# Altium PCB WirelessJoystick_Receiver.PcbDoc
Units mil, origin at the board's own origin, x right, y up, seen from the top; angles counter-clockwise.
Board outline 1275 x 1465 mil, 2 copper layers (Top Layer, Bottom Layer); 7 components, 36 nets, 60 pads, 10 vias.
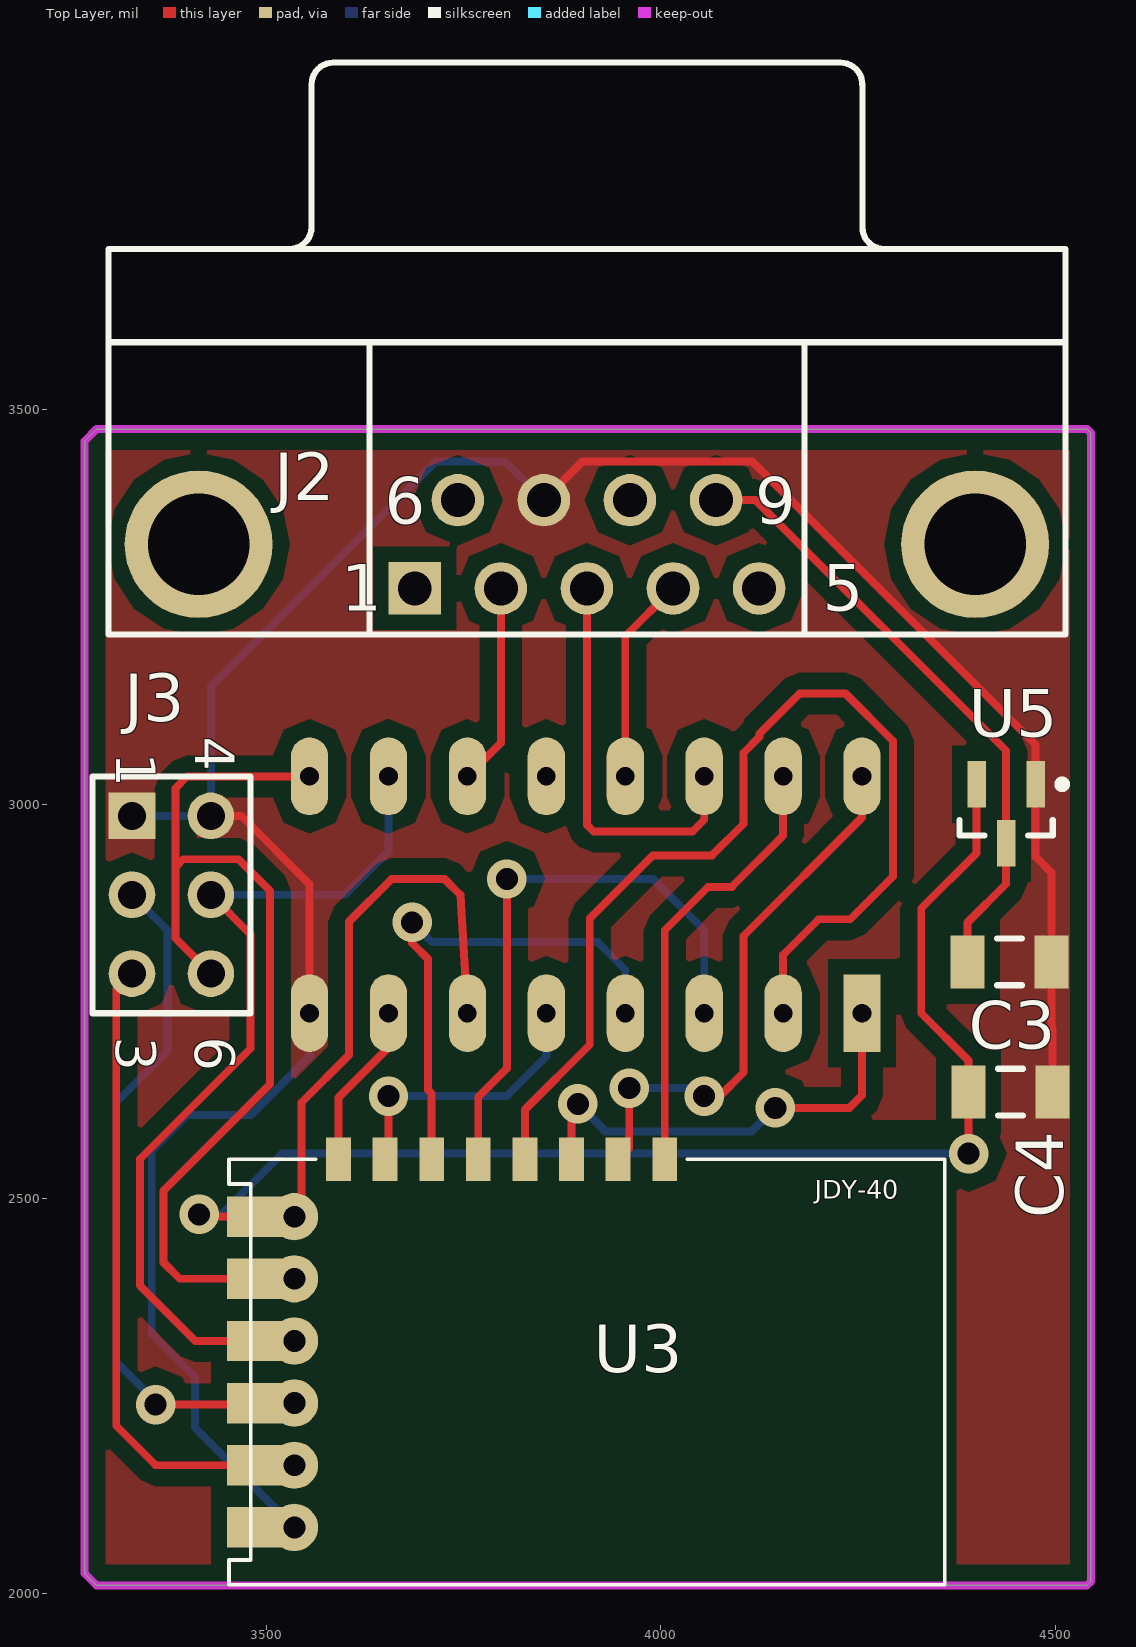
[diagram p0: Top Layer view]
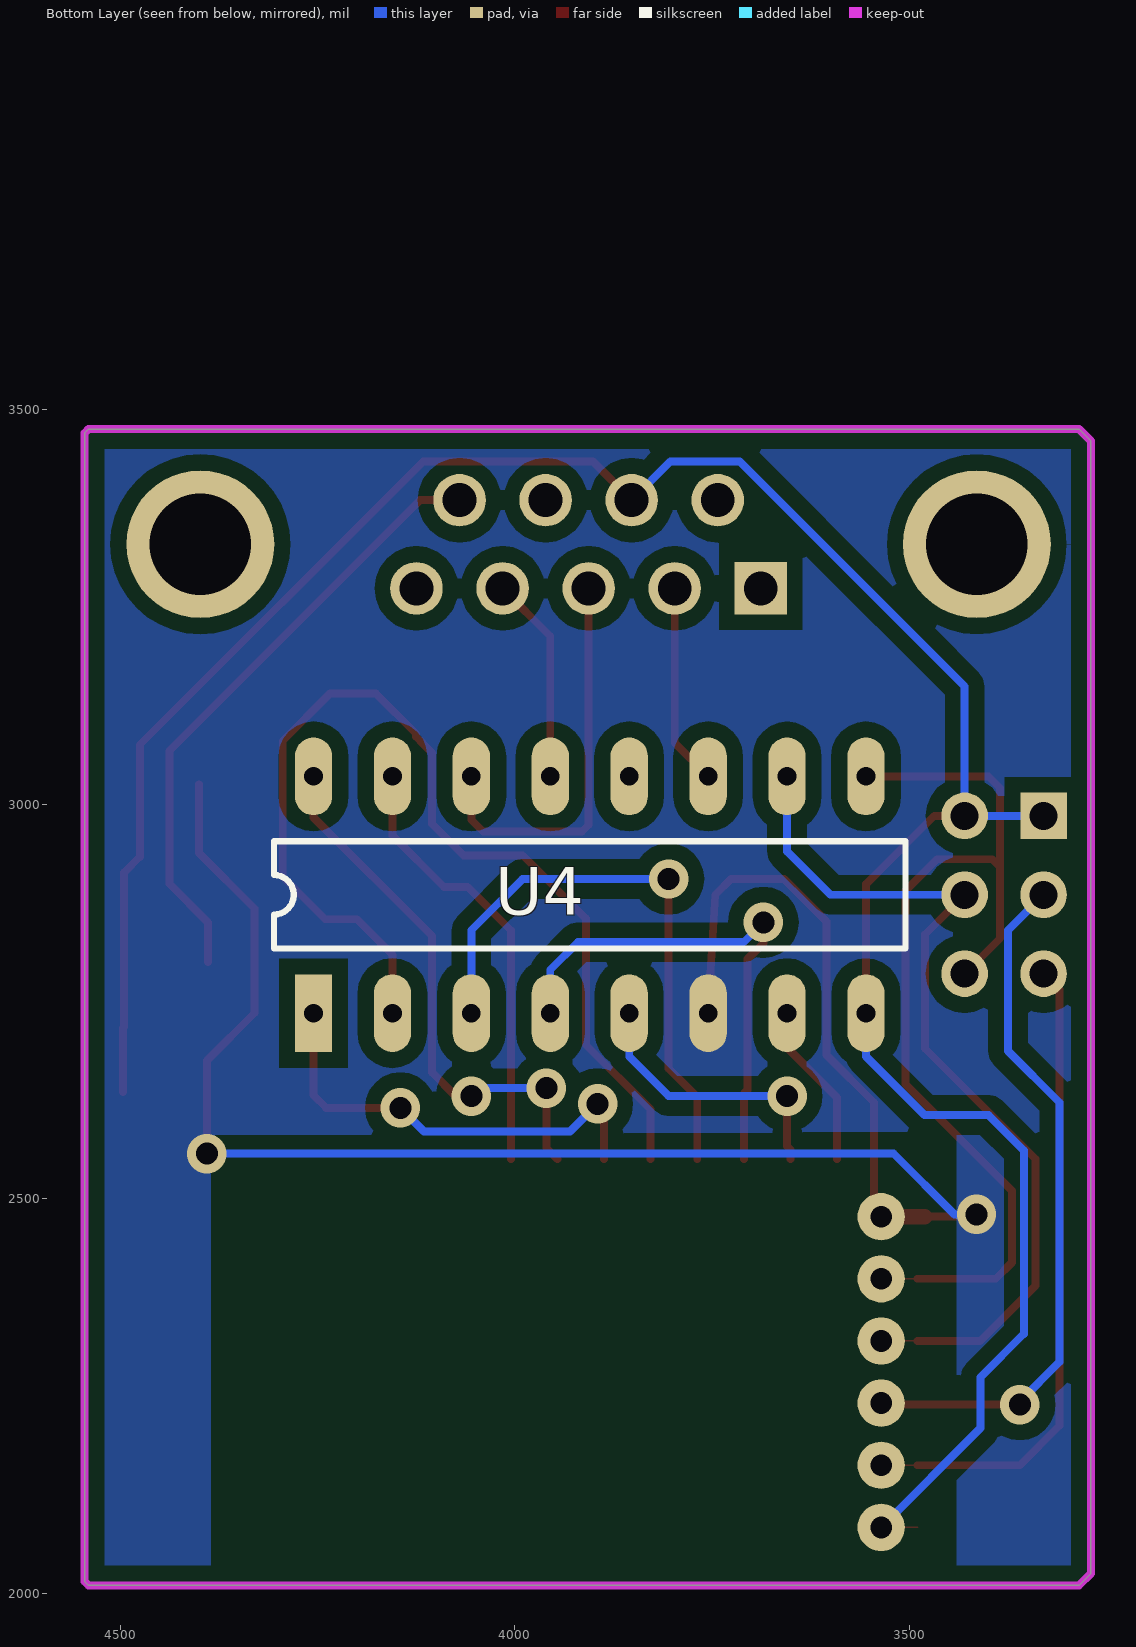
[diagram p1: Bottom Layer view, seen from below]

## Layer stack, top to bottom
Top Solder: solder mask 0.4, Solder Resist, Dk 3.5
Top Layer: signal copper 1.4
Dielectric 1: dielectric 12.6, FR-4, Dk 4.8
Bottom Layer: signal copper 1.4
Bottom Solder: solder mask 0.4, Solder Resist, Dk 3.5

## Board outline
3270,2025 3270,3460 3285,3475 4540,3475 4545,3470 4545,2015 4540,2010 3285,2010

## Design rules (kind name [scope] priority, off if disabled: settings)
Clearance Clearance_2 [InNamedPolygon('NETC4_2_L02_P002')] p1: gap=20 ignorepadtopadclearanceinfootprint=FALSE
Clearance Clearance_1 [InNamedPolygon('NETC3_1_L01_P000')] p2: gap=20 ignorepadtopadclearanceinfootprint=FALSE
Clearance [All] p3: gap=10 ignorepadtopadclearanceinfootprint=FALSE except(0: Arc-Hole Track-Hole SMDPad-Hole THPad-Hole Via-Hole Fill-Hole Poly-Hole Region-Hole Text-Hole)
PolygonConnect PolygonConnect_2 [All vs IsNamedPolygon('NETC4_2_L02_P002')] p1: connectstyle=Direct reliefconductorwidth=10 reliefentries=4 polygonreliefangle="90 Angle" airgapwidth=10
PolygonConnect PolygonConnect_1 [All vs IsNamedPolygon('NETC3_1_L01_P000')] p2: connectstyle=Direct reliefconductorwidth=10 reliefentries=4 polygonreliefangle="90 Angle" airgapwidth=10
PolygonConnect [All] p3: connectstyle=Relief reliefconductorwidth=10 reliefentries=4 polygonreliefangle="90 Angle" airgapwidth=10
RoutingVias [All] p1: holewidth=28 width=50 viastyle="Through Hole" minholewidth=28 minwidth=50 maxholewidth=28 maxwidth=50
SolderMaskExpansion [All] p1: expansion=4
Width [All] p1: maxlimit=10 minlimit=10 preferedwidth=10
30 further rules are at their usual default settings.

## Components (designator, comment, footprint, x,y, rotation, side; value= is the part's Value field where it differs from the comment)
C3 "Cap Semi" C1206 4441.85,2800 r180 top value=1uF
C4 "Cap Semi" C1206 4443.15,2635 r180 top value=1uF
J2 "DB9" DSUB1.385-2H9 3906.42,3703.11 r0 top
J3 "UART" HDR2X3_CEN 3330,2985 r270 top
U3 "JDY-40" JDY-401 4005,2550 r270 top
U4 "STC15W204S-DIP16" DIP16 4255,2735 r90 bottom
U5 "XC6206" SOT23-3N 4437.6,2987.6 r270 top

## Footprints (in the part's own frame and the unit in brackets; to place one, negate y for a bottom-side part, rotate by r counter-clockwise, add the part's x,y. Pads: shape width x height; smd on the part's side, far side on the other; paste and mask are expansions set on the pad)
C1206 [mm] "Chip Capacitor, Body 3.2x1.6mm, IPC High Density"
  rect 1.1x1.7 smd: 1(-1.35,0) 2(1.35,0)
  silkscreen extent -0.4,-0.75 0.4,0.75, body extent -1.7,-0.9 1.7,0.9, height 1.3
DIP16 [mm]
  rect 2.5x1.2 hole 0.6: 1(0,0)
  oval 2.5x1.2 hole 0.6: 2(0,-2.54) 3(0,-5.08) 4(0,-7.62) 5(0,-10.16) 6(0,-12.7) 7(0,-15.24) 8(0,-17.78) 9(7.62,-17.78) 10(7.62,-15.24) 11(7.62,-12.7) 12(7.62,-10.16) 13(7.62,-7.62) 14(7.62,-5.08) 15(7.62,-2.54) 16(7.62,0)
  silkscreen extent 2.08,-19.05 5.54,1.27
DSUB1.385-2H9 [mm] "Connector; D Subminiature; 9 Position; Right Angle; Pitch 1.385 mm"
  rect 1.69x1.69 hole 1.09: 1(-5.54,-10.92)
  round 1.69 hole 1.09: 2(-2.77,-10.92) 3(0,-10.92) 4(2.77,-10.92) 5(5.54,-10.92) 6(-4.155,-8.08) 7(-1.385,-8.08) 8(1.385,-8.08) 9(4.155,-8.08)
  round 4.76 hole 3.26: 10(-12.495,-9.5) 11(12.495,-9.5)
  silkscreen extent -15.4,-12.4 15.4,6
HDR2X3_CEN [mm] "Connector; Header; 3x2 Position"
  rect 1.5x1.5 hole 0.9: 1(0,0)
  round 1.5 hole 0.9: 2(2.54,0) 3(5.08,0) 4(0,2.54) 5(2.54,2.54) 6(5.08,2.54)
  silkscreen extent -1.27,-1.27 6.35,3.81
JDY-401 [mm]
  rect 1.4x0.8 smd: 1(0,0) 2(0,-1.5) 3(0,-3) 4(0,-4.5) 5(0,-6) 6(0,-7.5) 7(0,-9) 8(0,-10.5)
  round 1.524 hole 0.7: 9(1.85,-11.918) 10(3.85,-11.918) 11(5.85,-11.918) 12(7.85,-11.918) 13(9.85,-11.918) 14(11.85,-11.918)
  rect 1.3x2 smd: 9(1.85,-13.092) 10(3.85,-13.092) 11(5.85,-13.092) 12(7.85,-13.092) 13(9.85,-13.092) 14(11.85,-13.092)
  Top Layer lines w0.051: 11.85,-13.092 11.85,-11.918 ; 9.85,-13.092 9.85,-11.918 ; 7.85,-13.092 7.85,-11.918 ; 5.85,-13.092 5.85,-11.918 ; 3.85,-13.092 3.85,-11.918 ; 1.85,-13.092 1.85,-11.918 ; 7.85,-11.918 7.85,-11.918
  Top Layer lines w0.17: 7.85,-11.918 7.636,-11.704
  Top Layer lines w0.5: 1.85,-13.319 1.85,-13.092 1.85,-11.918 1.85,-11.694
  silkscreen extent 0,-14.02 13.7,9.01
SOT23-3N [mm] "SOT23, 3-Leads, Body 2.9x1.3mm, Pitch 0.95mm, Lead Span 2.5mm, IPC Medium Density"
  rect 1.5x0.6 smd: 1(-0.95,0.95) 2(-0.95,-0.95) 3(0.95,0)
  silkscreen extent -1.07,-1.5 0.7,1.93, body extent -0.7,-1.5 0.7,1.5, height 1.1

## Part data
C3 C4: "Capacitor (Semiconductor SIM Model)", LatestRevisionDate=29-May-2009, LatestRevisionNote="IPC-7351 Footprint Added.", PackageDescription="Chip Capacitor", PackageReference=C1206, Published=8-Jun-2000, Publisher="Altium Limited"
J2: library part "D Connector 9", "Receptacle Assembly, 9 Position, Right Angle", PackageDocument=O, DatasheetDocument=1-Sep-1999, Gender=Receptacle, LatestRevisionDate=17-Jul-2002, LatestRevisionNote="Re-released for DXP Platform.", Orientation="Right Angle", PackageReference=788750, Positions=9, Published=15-Jun-2001, Publisher="Altium Limited"
J3: library part "Header 3X2A", "Header, 3-Pin, Dual row", LatestRevisionDate=17-Jul-2002, LatestRevisionNote="Re-released for DXP Platform.", Publisher="Altium Limited"

## Via types
v1: diameter 50, hole 28, Top Layer to Bottom Layer, 10 vias

## Nets (pads, with @x,y where several pads share a name; then routed paths per layer and width w, separated by ;. In a path a pad name is that pad's centre, name@x,y a point inside that pad or via, vN(x,y) a via of type N, cw(c..) or ccw(c..) an arc to the next point about the centre after c; other vN are vias at no path point)
D0: U3.1 U4.15 | length 564.7
  Top Layer w10: U3.1 4005,2840 4060,2895 4090,2895 4155,2960 U4.15
D1: U3.2 U4.16 | length 694.5
  Top Layer w10: U3.2 3960,2564.06 v1(3960,2640) ; v1(4055,2630) 4075,2630 4105,2660 4105,2833 4255,2983 U4.16
  Bottom Layer w10: v1(3960,2640) 4045,2640 v1(4055,2630)
D2: U3.3 U4.1 | length 570.9
  Top Layer w10: U3.3 3886.89,2611.89 v1(3895,2620) ; v1(4145,2615) 4239,2615 4255,2631 U4.1
  Bottom Layer w10: v1(3895,2620) 3930,2585 4115,2585 v1(4145,2615)
D3: U3.4 U4.2 | length 1347
  Top Layer w10: U3.4 3827.83,2612.83 3910,2695 3910,2855 3990,2935 4065,2935 4105,2975 4105,3065 4116.38,3076.38 4116.38,3076.59 4125,3085.21 4125,3089 4176,3140 4234,3140 4294,3080 4294,2908 4240,2854 4200,2854 4155,2809 U4.2
D4: U3.5 U4.3 | length 751.9
  Top Layer w10: U3.5 3768.78,2628.78 3805,2665 v1(3805,2905)
  Bottom Layer w10: v1(3805,2905) 3990,2905 4055,2840 U4.3
D5: U3.6 U4.4 | length 660.1
  Top Layer w10: v1(3685,2850) 3685,2823.72 3705,2803.72 3705,2637.88 3709.72,2633.16 U3.6
  Bottom Layer w10: v1(3685,2850) 3710,2825 3920,2825 3955,2790 U4.4
D6: U3.7 U4.5 | length 358.5
  Top Layer w10: U3.7 3650.67,2562 3655,2566.33 v1(3655,2630) v1@3655,2631
  Bottom Layer w10: v1(3655,2630) 3805,2630 3855,2680 U4.5
D7: U3.8 U4.7 | length 211.8
  Top Layer w10: U3.8 3591.61,2628.18 U4.7@3655,2691.57 ; U4.7@3655,2691 U4.7@3655,2691.57 ; U4.7 U4.7@3655,2691.57
NetC1_1: 
NetC1_2: 
NetC2_2: 
NetC3_1: C3.1 C4.1 J2.7 J3.1 J3.4 U3.14 U4.8 U5.1 | length 3246.2
  Top Layer w10: J3.4 3468.44,2985 3555,2898.44 U4.8 ; J2.7 3900.89,3434 4116,3434 4475,3075 U5.1 4475,2933 4495,2913 C3.1 4495,2717.3 4496.3,2716 C4.1
  Bottom Layer w10: J3.1 J3.4 3430,3149 3715,3434 3802.89,3434 J2.7 ; U3.14@3535.79,2083.46 3410,2209.25 3410,2273.7 3355,2328.7 3355,2561 3400,2606 3481,2606 3555,2680 U4.8
NetC3_2: C3.2 J2.9 U5.3 | length 786.8
  Top Layer w10: J2.9 4120,3385 4437.6,3067.4 U5.3 4437.6,2898.9 4388.7,2850 C3.2
NetC4_2: C4.2 U3.9 U4.6 U5.2 | length 2316.4
  Top Layer w10: v1(3415,2480) 3429.46,2480 3432.29,2477.17 U3.9@3480.62,2477.17 ; U3.9@3544.62,2477.17 3544.62,2621.62 3605,2682 3605,2851 3659,2905 3726,2905 3746,2885 U4.6 ; v1(4390,2557) C4.2 4390,2675 4330,2735 4330,2867.8 4400.2,2938 U5.2
  Bottom Layer w10: v1(3415,2480) 3443,2480 3520,2557 v1(4390,2557)
NetD1_2: 
NetJ1_2: 
NetJ1_3: 
NetJ1_5: 
NetJ1_6: 
NetJ2_2: J2.2 U4.11 | length 255.7
  Top Layer w10: U4.11 3797.36,3077.36 J2.2
NetJ2_3: J2.3 U4.14 | length 513
  Top Layer w10: J2.3 3906.42,2973.58 3915,2965 4040,2965 4055,2980 U4.14
NetJ2_4: J2.4 U4.13 | length 263.2
  Top Layer w10: U4.13 3955,3212.72 J2.4
NetJ3_2: J3.2 U3.12 | length 900.8
  Top Layer w10: v1(3360,2239) 3533.84,2239 3535.79,2240.94 U3.12@3544.21,2249.37
  Bottom Layer w10: J3.2 3375,2840 3375,2687 3310,2622 3310,2293 3360,2243 v1(3360,2239)
NetJ3_3: J3.3 U3.13 | length 781.4
  Top Layer w10: J3.3 3310,2765 3310,2212.2 3360,2162.2 U3.13@3489.58,2162.2
NetJ3_5: J3.5 U3.11 U4.10 | length 1095.2
  Top Layer w10: J3.5 3480,2835 3480,2690 3340,2550 3340,2390 3410.31,2319.69 U3.11@3489.58,2319.69
  Bottom Layer w10: J3.5 3600,2885 3655,2940 U4.10
NetJ3_6: J3.6 U3.10 U4.9 | length 1225.6
  Top Layer w10: J3.6 3385,2830 3385,2920 ; U3.10@3489.58,2398.43 3390.57,2398.43 3370,2419 3370,2510 3505,2645 3505,2890 3465,2930 3395,2930 3385,2920 ; U4.9 3400,3035 3385,3020 3385,2920
NetK1_2: 
NetK2_2: 
NetK3_2: 
NetK4_2: 
NetK5_2: 
NetK6_2: 
NetK7_2: 
NetK8_2: 
NetK9_2: 
NetR1_1: 
pads on no net: J2.1 J2.5 J2.6 J2.8 J2.10 J2.11 U4.12

## Polygon pours and split planes (outlines as drawn)
NetC3_1 on Top Layer "NETC3_1_L01_P000" (solid, pour order 0): 3285,3460 3285,2025 4530,2025 4530,3465
NetC4_2 on Bottom Layer "NETC4_2_L02_P002" (solid, pour order 2): 3285,3455 3285,2025 4525,2025 4530,2030 4530,3465

## Keep-outs
Keep-Out Layer:
  the board outline again, w10

## Other copper
Top Layer:
  pour cut-out: 3430,2600 4375,2600 4375,2010 3430,2010
Bottom Layer:
  pour cut-out: 3440,2585 3440,2015 3435,2010 4385,2010 4385,2575 4380,2580

## Text inside footprints (layer, text, board x,y; h text height)
J2: Top Overlay "6" at 3650,3355 h59.06; Top Overlay "9" at 4120,3355 h59.06; Top Overlay "5" at 4205,3245 h59.06; Top Overlay "1" at 3595,3245 h59.06
J3: Top Overlay "4" at 3410,3085 h50 r270; Top Overlay "1" at 3310,3065 h50 r270; Top Overlay "3" at 3310,2705 h50 r270; Top Overlay "6" at 3410,2705 h50 r270